# EAGLE board snake-main-small (EAGLE 6.5.0)
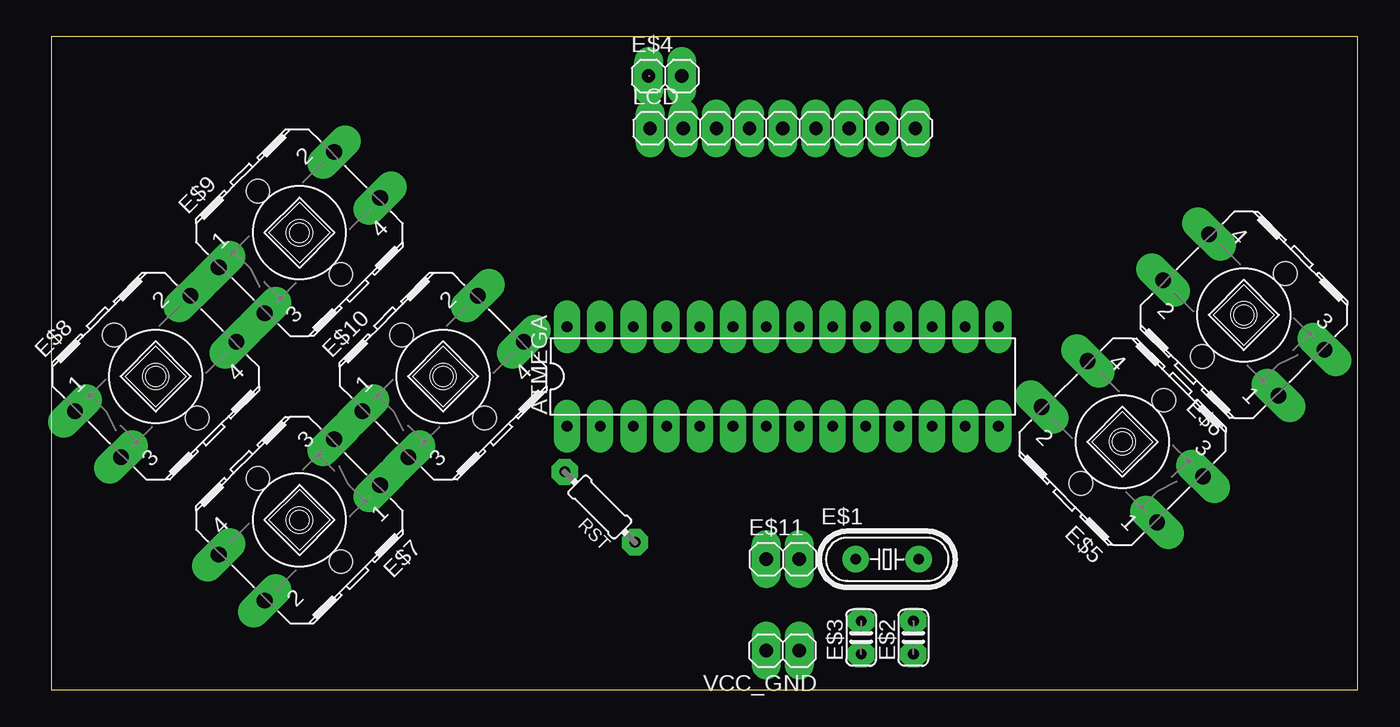
[diagram p0: board, top side]
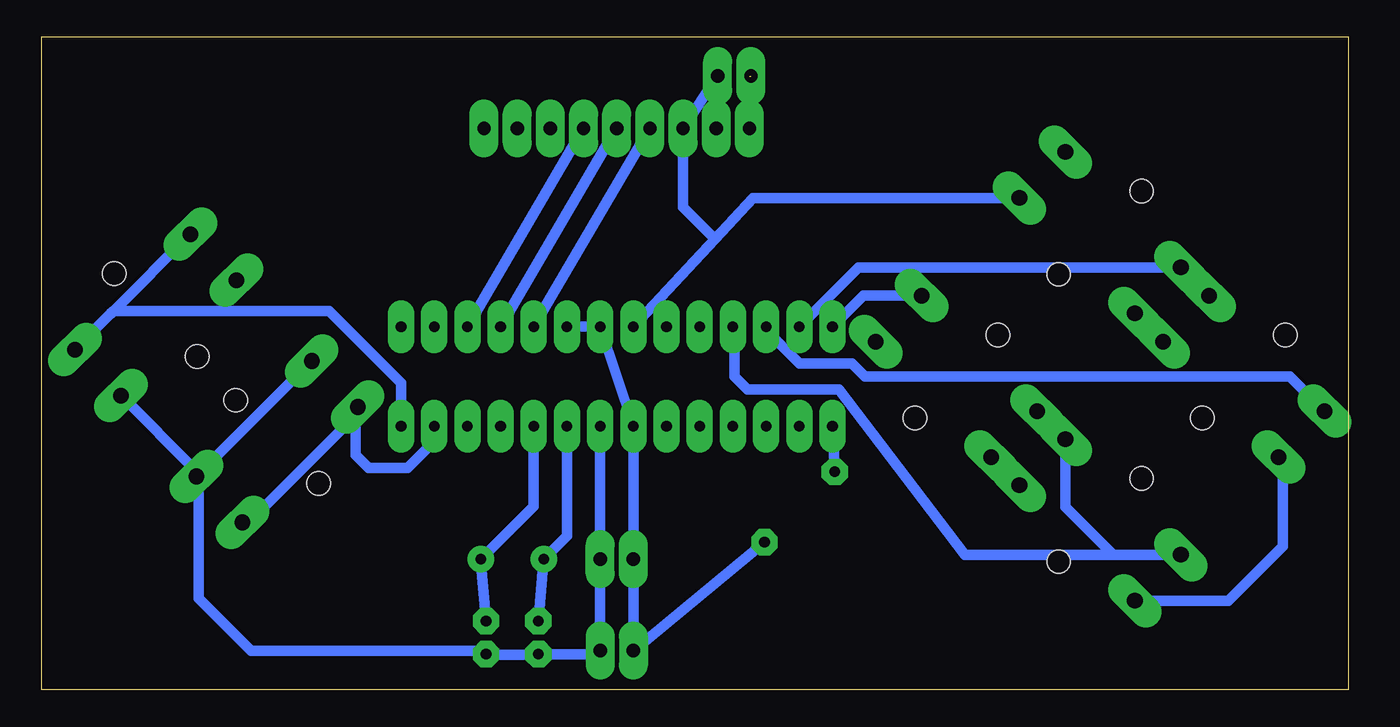
[diagram p1: board, bottom side, seen from below]

Size 100 x 50 mm. Coordinates in mm from the lower left corner, seen from the top.
Outline: 0,0 100,0 100,50 0,50 0,0
Copper layers (1*16): Top 0.035mm / dielectric 1.5mm / Bottom 0.035mm
Design rules "hobby": minimum track width 0.8mm, minimum drill 0.8mm, track to track 0.8mm, track to pad 0.8mm, pad to pad 0.45mm, via to via 0.8mm, smd to smd 8mil, copper to edge 10mil, drill to drill 8mil, minimum pad ring 0.6mm, minimum via ring 0.6mm, stop-mask expansion 0mil, vias tented up to drill 0mil, thermal gap 10mil
tRestrict: area 36,5 to 76,45; 4 lines

## Footprints (pad centres in the part's own frame; a part is rotated, then mirrored left to right if it is on the bottom)
DIL28-3 = drill 0.813 long: 1 -16.51,-3.81; 2 -13.97,-3.81; 3 -11.43,-3.81; 4 -8.89,-3.81; 5 -6.35,-3.81; 6 -3.81,-3.81; 7 -1.27,-3.81; 8 1.27,-3.81; 9 3.81,-3.81; 10 6.35,-3.81; 11 8.89,-3.81; 12 11.43,-3.81; 13 13.97,-3.81; 14 16.51,-3.81; 15 16.51,3.81; 16 13.97,3.81; 17 11.43,3.81; 18 8.89,3.81; 19 6.35,3.81; 20 3.81,3.81; 21 1.27,3.81; 22 -1.27,3.81; 23 -3.81,3.81; 24 -6.35,3.81; 25 -8.89,3.81; 26 -11.43,3.81; 27 -13.97,3.81; 28 -16.51,3.81
HC49/S = drill 0.813: 1 -2.413,0; 2 2.413,0
C025-024X044 = drill 0.813 pad 1.422 octagon: 1 -1.27,0; 2 1.27,0
1X02 = drill 1.016 long: 1 -1.27,0; 2 1.27,0
B3F-40XX = drill 1.194 long: 1 -6.248,2.489; 2 6.248,2.489; 3 -6.248,-2.489; 4 6.248,-2.489 | hole 1.803: 0,-4.496; 0,4.496
1X09 = drill 1.016 long: 1 -10.16,0; 2 -7.62,0; 3 -5.08,0; 4 -2.54,0; 5 0,0; 6 2.54,0; 7 5.08,0; 8 7.62,0; 9 10.16,0
0204/7 = drill 0.813 octagon: 1 -3.81,0; 2 3.81,0

## Placement (x,y rotation side)
ATMEGA  [DIL28-3]  56,24 0 top
E$1  [HC49/S]  64,10 0 top
E$2  [C025-024X044]  66,4 90 top
E$3  [C025-024X044]  62,4 90 top
E$4  [1X02]  47,47 0 top
E$5  [B3F-40XX]  82,19 135 top
E$6  [B3F-40XX]  91.29,28.71 135 top
E$7  [B3F-40XX]  19,13 225 top
E$8  [B3F-40XX]  8,24 45 top
E$9  [B3F-40XX]  19,35 45 top
E$10  [B3F-40XX]  30,24 45 top
E$11  [1X02]  56,10 0 top
LCD  [1X09]  56,43 0 top
RST  10k  [0204/7]  42,14 135 top
VCC_GND  [1X02]  56,3 180 top

## Library data of the parts
ATMEGA = ic-package
E$1-E$3 E$5-E$10 = adafruit
E$4 E$11 LCD VCC_GND = pinhead
RST = resistor

## Nets
S$1: ATMEGA.14 E$6.3 E$6.4
S$2: ATMEGA.13 E$5.1 E$5.2
S$3: ATMEGA.1 RST.2
S$4: ATMEGA.19 LCD.4
S$5: E$4.1 LCD.1
S$6: ATMEGA.10 E$1.2 E$2.2
S$7: ATMEGA.9 E$1.1 E$3.2
S$8: ATMEGA.22 E$4.2 E$9.4 LCD.3
S$9: ATMEGA.18 LCD.5
S$10: ATMEGA.17 LCD.6
S$11: E$7.1 E$10.3
S$12: E$7.2 E$8.3
S$13: E$8.4 E$9.3
S$14: ATMEGA.25 E$7.3 E$7.4
S$15: ATMEGA.26 E$8.1
S$16: ATMEGA.28 E$10.2
S$17: ATMEGA.27 E$9.1
S$18: ATMEGA.8 E$2.1 E$3.1 E$5.3 E$5.4 E$6.1 E$11.2 VCC_GND.1
S$21: ATMEGA.7 ATMEGA.20 ATMEGA.21 E$11.1 RST.1 VCC_GND.2

## Tracks (layer width: path | path; a pad name or v marks a point on that pad's centre or on a via)
S$1
  Bottom 0.8: ATMEGA.14 72.51,23.51 78,29 94.52,29 | 94.52,29 94.76,28.76 E$6.3 | E$6.4 94.52,29
S$2
  Bottom 0.8: ATMEGA.13 69.97,19.03 72,17 75,17 76,18 76,21 | 76,21 76,21.48 E$5.2 | E$5.1 84.18,12.82 76,21
S$3
  Bottom 0.8: RST.2 ATMEGA.1
S$4
  Bottom 0.8: LCD.4 ATMEGA.19
S$5  (1 unrouted)
  Bottom 0.8: 45.84,47 LCD.1
S$6
  Bottom 0.8: ATMEGA.10 62.35,14.06 E$1.2 E$2.2
S$7
  Bottom 0.8: E$3.2 E$1.1 59.81,11.78 ATMEGA.9
S$8
  Bottom 0.8: E$4.2 LCD.3 50.92,36.96 48.49,34.52 | ATMEGA.22 48.49,34.52 | 48.49,34.52 45.58,37.66 E$9.4
S$9
  Bottom 0.8: LCD.5 ATMEGA.18
S$10
  Bottom 0.8: LCD.6 ATMEGA.17
S$11
  Bottom 0.8: E$7.1 E$10.3
S$12
  Bottom 0.8: E$7.2 9.18,6.82 5,11 5,17.48 E$8.3
S$13
  Bottom 0.8: E$8.4 E$9.3
S$14
  Bottom 0.8: E$7.4 18,10.34 | 18,10.34 29.34,10.34 39,23 46,23 47,24 47,27.7 ATMEGA.25 | E$7.3 21.66,14 18,10.34
S$15
  Bottom 0.8: ATMEGA.26 44.57,27.57 42,25 38,25 37,24 4.48,24 E$8.1
S$16
  Bottom 0.8: ATMEGA.28 37.12,30.18 E$10.2
S$17
  Bottom 0.8: ATMEGA.27 37.5,32.34 E$9.1
S$18
  Bottom 0.8: E$2.1 65.97,2.69 62.16,2.69 E$3.1 57.54,2.73 VCC_GND.1 E$11.2 ATMEGA.8 | 66.27,3 E$2.1 | E$2.1 66,3 84,3 88,7 88,16.16 E$5.3 | E$5.3 88.18,16.76 E$6.1 | E$5.3 E$5.4
S$21
  Bottom 0.8: RST.1 VCC_GND.2 E$11.1 ATMEGA.7 ATMEGA.21 ATMEGA.20